# Altium PCB GEM_HV_channel.PcbDoc (part 2 of 3)
Units mm, origin at the board's own origin, x right, y up, seen from the top; angles counter-clockwise.
Board outline 124.5 x 38 mm, 4 copper layers (Top Layer, Layer 1, Layer 2, Bottom Layer), stack 1.441 mm thick; 166 components, 114 nets, 518 pads, 164 vias.
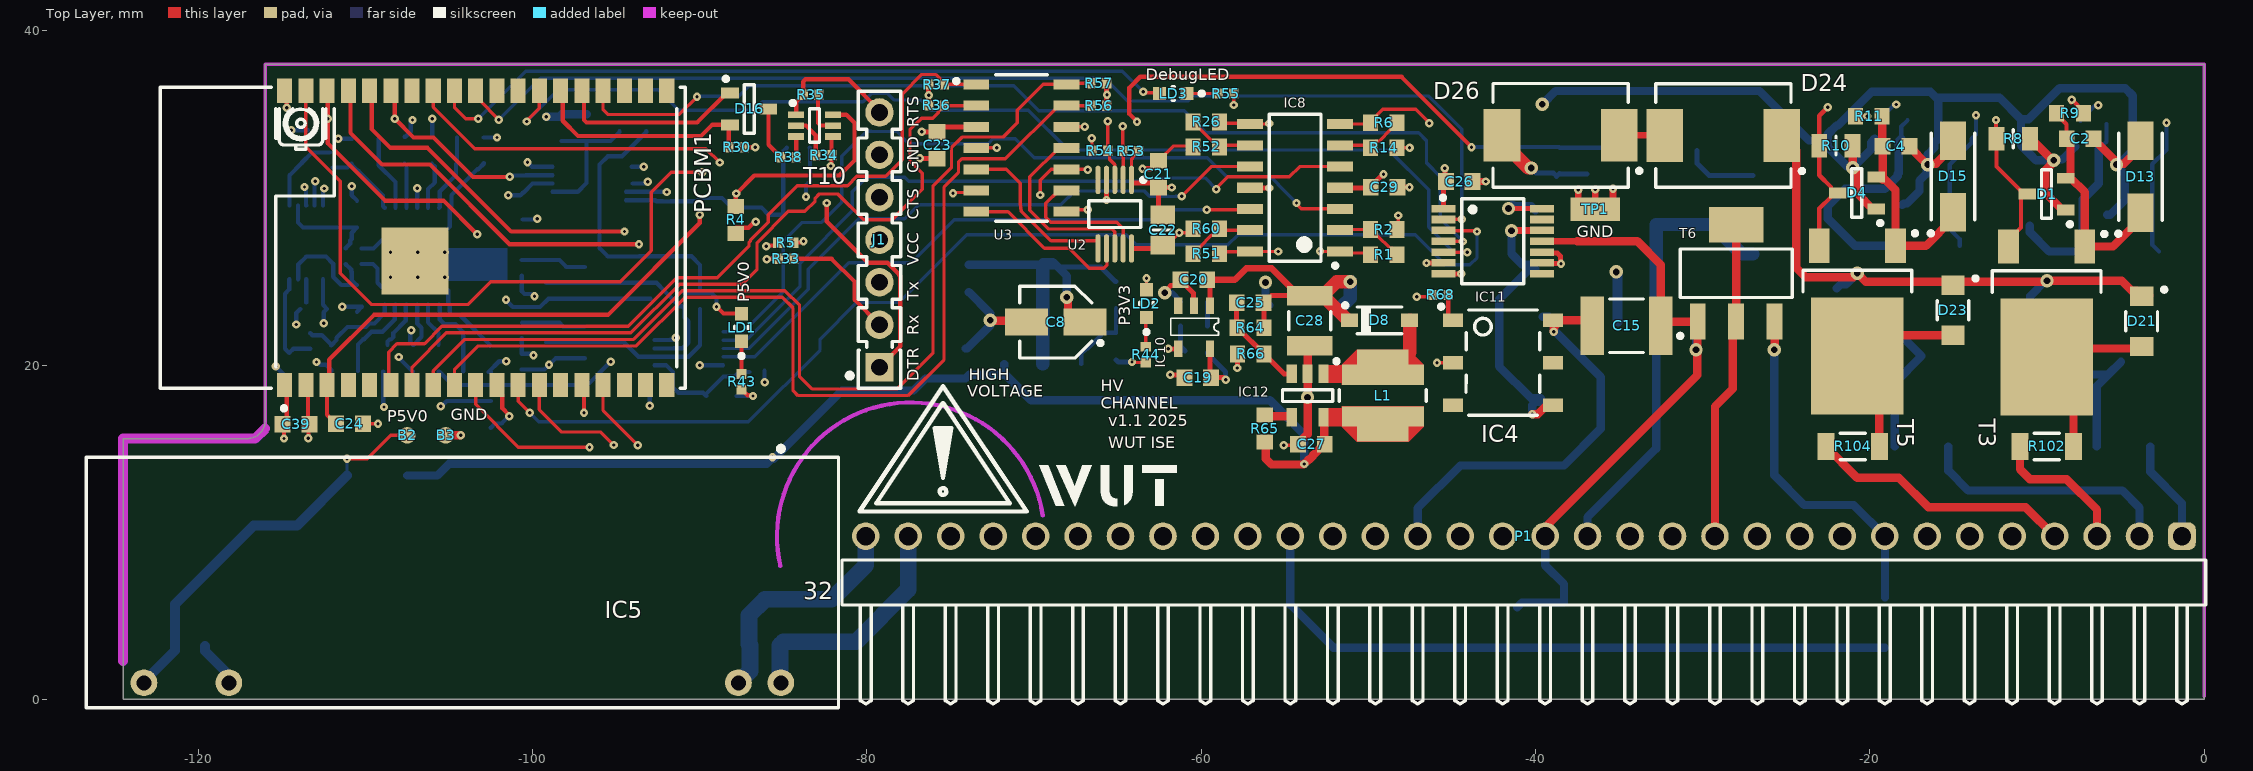
[diagram p0: Top Layer view]

## Part data (continued)
R43: library part R0402_3K3_1%_0.0625W_100PPM, "Resistor - 1%", Case=0402, Manufacturer=GENERIC, Manufacturer1 ComponentHeight=0.4mm, Manufacturer1 Example="YAGEO PHYCOMP", Manufacturer1 Part Number=232270673302L, Power=0.0625W, Tolerance=±1%, Author="CERN DEM JLC", Component Type=Standard, CreateDate=03.12.2007, HelpURL=\\cern.ch\dfs\Applications\Altium\Datasheets\R0402_Phycomp_RC0402.pdf, LatestRevisionDate=17.10.2012, Manufacturer Part Number=R0402_3K3_1%_0.0625W_100PPM, Mounted=Yes, Part Description="General Purpose Thick Film Chip Resistor", Part Number=R0402_3K3_1%_0.0625W_100PPM, Pin Count=2, PressFit=No, Sense=No, SMD=Yes, Socket=No, Status="Not Recommended", TC=±100ppm/°C
R61 R64: library part R0603_510K_1%_0.1W_100PPM, "Resistor - 1%", Case=0603, Manufacturer=GENERIC, Manufacturer1 ComponentHeight=0.55mm, Manufacturer1 Example="NIC COMPONENT", Manufacturer1 Part Number=NRC06F5103TRF, Power=0.1W, Tolerance=±1%, Author="CERN DEM JLC", Component Type=Standard, CreateDate=03.12.2007, HelpURL=\\cern.ch\dfs\Applications\Altium\Datasheets\R0603_NIC_NRC.pdf, LatestRevisionDate=13.03.2008, Manufacturer Part Number=R0603_510K_1%_0.1W_100PPM, Mounted=Yes, Part Description="General Purpose Thick Film Chip Resistor", Part Number=R0603_510K_1%_0.1W_100PPM, Pin Count=2, PressFit=No, Sense=No, SMD=Yes, Socket=No, Status=Preferred, TC=±100ppm/°C
R62 R63 R65 R66: library part R0603_18K_1%_0.1W_100PPM, "Resistor - 1%", Case=0603, Manufacturer=GENERIC, Manufacturer1 ComponentHeight=0.55mm, Manufacturer1 Example="NIC COMPONENT", Manufacturer1 Part Number=NRC06F1802TRF, Power=0.1W, Tolerance=±1%, Author="CERN DEM JLC", Component Type=Standard, CreateDate=03.12.2007, HelpURL=\\cern.ch\dfs\Applications\Altium\Datasheets\R0603_NIC_NRC.pdf, LatestRevisionDate=13.03.2008, Manufacturer Part Number=R0603_18K_1%_0.1W_100PPM, Mounted=Yes, Part Description="General Purpose Thick Film Chip Resistor", Part Number=R0603_18K_1%_0.1W_100PPM, Pin Count=2, PressFit=No, Sense=No, SMD=Yes, Socket=No, Status=Preferred, TC=±100ppm/°C
R68: library part R0402_330R_1%_0.0625W_100PPM, "Resistor - 1%", Case=0402, Manufacturer=GENERIC, Manufacturer1 ComponentHeight=0.4mm, Manufacturer1 Example="YAGEO PHYCOMP", Manufacturer1 Part Number=232270673301L, Power=0.0625W, Tolerance=±1%, Author="CERN DEM JLC", Component Type=Standard, CreateDate=03.12.2007, HelpURL=\\cern.ch\dfs\Applications\Altium\Datasheets\R0402_Phycomp_RC0402.pdf, LatestRevisionDate=17.10.2012, Manufacturer Part Number=R0402_330R_1%_0.0625W_100PPM, Mounted=Yes, Part Description="General Purpose Thick Film Chip Resistor", Part Number=R0402_330R_1%_0.0625W_100PPM, Pin Count=2, PressFit=No, Sense=No, SMD=Yes, Socket=No, Status="Not Recommended", TC=±100ppm/°C
R73: library part R0402_10R_1%_0.0625W_200PPM, "Resistor - 1%", Case=0402, Manufacturer=GENERIC, Manufacturer1 ComponentHeight=0.4mm, Manufacturer1 Example="YAGEO PHYCOMP", Manufacturer1 Part Number=232270671009L, Power=0.0625W, Tolerance=±1%, Author="CERN DEM JLC", Component Type=Standard, CreateDate=24.06.2009, HelpURL=\\cern.ch\dfs\Applications\Altium\Datasheets\R0402_Phycomp_RC0402.pdf, LatestRevisionDate=17.10.2012, Manufacturer Part Number=R0402_10R_1%_0.0625W_200PPM, Mounted=Yes, Part Description="General Purpose Thick Film Chip Resistor", Part Number=R0402_10R_1%_0.0625W_200PPM, Pin Count=2, PressFit=No, Sense=No, SMD=Yes, Socket=No, Status="Not Recommended", TC=±200ppm/°C
R101 R102 R103 R104: library part R1206_50K_1%_0.33W_100PPM_SEI_HVC, "Resistor - 1%", Case=1206, Manufacturer="SEI (STACKPOLE ELECTRONICS INC.)", Manufacturer Part Number=HVCB1206FDD50K0, Power=0.33W, Tolerance=±1%, Voltage=1500V, Author="CERN DEM JLC", Component Type=Standard, ComponentHeight=0.76mm, CreateDate=18.01.2018, HelpURL=\\cern.ch\dfs\Applications\Altium\Datasheets\R1206_SEI_HVC.pdf, LatestRevisionDate=28.06.2022, Mounted=Yes, Part Description="High Voltage Thick Film Chip Resistor", Part Number=R1206_50K_1%_0.33W_100PPM_SEI_HVC, Pin Count=2, PressFit=No, Sense=No, SMD=Yes, Socket=No, Status=None, TC=±100ppm/°C
R107 R108 R109 R110: library part R0603_6K8_1%_0.1W_100PPM, "Resistor - 1%", Case=0603, Manufacturer=GENERIC, Manufacturer1 ComponentHeight=0.55mm, Manufacturer1 Example="NIC COMPONENT", Manufacturer1 Part Number=NRC06F6801TRF, Power=0.1W, Tolerance=±1%, Author="CERN DEM JLC", Component Type=Standard, CreateDate=03.12.2007, HelpURL=\\cern.ch\dfs\Applications\Altium\Datasheets\R0603_NIC_NRC.pdf, LatestRevisionDate=13.03.2008, Manufacturer Part Number=R0603_6K8_1%_0.1W_100PPM, Mounted=Yes, Part Description="General Purpose Thick Film Chip Resistor", Part Number=R0603_6K8_1%_0.1W_100PPM, Pin Count=2, PressFit=No, Sense=No, SMD=Yes, Socket=No, Status=Preferred, TC=±100ppm/°C
T1: library part Q_PBHV8560Z, "600 V, 0.5 A NPN high-voltage low VCEsat (BISS) transistor", Case=SOT223, Manufacturer=Nexperia, Author=GK, Bonding=No, Component Type=Standard, ComponentHeight=1.8mm, CreateDate=15.06.2011, Device=PBHV8560ZX, HelpURL=\\cern.ch\dfs\Applications\Altium\Datasheets\FZT458TA.pdf, LatestRevisionDate=15.06.2011, Manufacturer Part Number=PBHV8560ZX, Mounted=Yes, PackageDescription="SOT223, 2.30mm Pitch; 4 Pin, 3.70mm W X 6.70mm L X 1.80mm H body, IPC Medium Density", Part Description="600V 500mA NPN High Voltage Transistor", Part Number=PBHV8560ZX, Pin Count=4, PressFit=No, Sense=No, SMD=Yes, Socket=No
T2 T3 T4 T5: "N-CHANNEL MOSFET WITH DIODE", Case=DPAK, Manufacturer=IXYS, Author="CERN DEM JLC", Bonding=No, Component Type=Standard, ComponentHeight=2.38mm, CreateDate=04.02.2009, Device=IXTY01N100, HelpURL=\\cern.ch\dfs\Applications\Altium\Datasheets\IXTY01N100.pdf, LatestRevisionDate=31.01.2011, Manufacturer Part Number=IXTY01N100, Mounted=Yes, PackageDescription="TO-252AA DPAK TO, 2.28mm pitch; 2 pin,9.91mm L X 6.095mm W X 2.38mm H body, IPC Medium Density", Part Description="1000V 100mA N-Channel High Voltage MOSFET", Part Number=IXTY01N100, Pin Count=3, PressFit=No, Sense=No, SMD=Yes, Socket=No
T6: "PNP Transistor", Case=SOT223, Manufacturer=STMicroelectronics, Author=FS, Bonding=No, Component Type=Standard, ComponentHeight=1.8mm, CreateDate=15.06.2011, Device=STN9360, HelpURL=\\cern.ch\dfs\Applications\Altium\Datasheets\BF723,115.pdf, LatestRevisionDate=15.06.2011, Manufacturer Part Number=STN9360, Mounted=Yes, PackageDescription="SOT223, 2.30mm Pitch; 4 Pin, 3.70mm W X 6.70mm L X 1.80mm H body, IPC Medium Density", Part Description="250V 100mA PNP High-Voltage Transistors", Part Number=STN9360, Pin Count=4, PressFit=No, Sense=No, SMD=Yes, Socket=No
T8 T9: "N-CHANNEL MOSFET WITH DIODE", Case=SOT23-3, Manufacturer="ON SEMICONDUCTOR", Manufacturer Part Number=BSS138L, Author="CERN DEM JLC", Bonding=No, Component Type=Standard, ComponentHeight=1.11mm, CreateDate=23.03.2009, Device=BSS138LT1G, HelpURL=\\cern.ch\dfs\Applications\Altium\Datasheets\BSS138LT1G.pdf, LatestRevisionDate=25.05.2022, Mounted=Yes, PackageDescription="SOT23, 0.95mm Pitch; 3 Pin, 1.40mm W X 3.00mm L X 1.10mm H body, IPC Medium Density", Part Description="50V, 200mA N-Channel Enhancement Mode Field-Effect Transistor", Part Number=BSS138LT1G, Pin Count=3, PressFit=No, Sense=No, SMD=Yes, Socket=No
T10: "45V 100mA Dual NPN General-Purpose Transistor", Case=SOT363, Manufacturer="NXP SEMICONDUCTORS", Author="CERN DEM JMW", Bonding=No, Component Type=Standard, ComponentHeight=1.1mm, CreateDate=10.07.2015, Device=BC847BS, HelpURL=\\cern.ch\dfs\Applications\Altium\Datasheets\BC847BS.pdf, LatestRevisionDate=10.07.2015, Manufacturer Part Number=BC847BS, Mounted=Yes, PackageDescription="SOT363, SC-88, SOT, 0.65mm Pitch, 6 pin, 1.25mm W X 2.00mm L X 1.10mm H, IPC Medium Density", Part Description="45V 100mA Dual NPN General-Purpose Transistor", Part Number=BC847BS, Pin Count=6, PressFit=No, Sense=No, SMD=Yes, Socket=No
TP1: library part TYCO_RCT-0C, "Test Point", Manufacturer="TYCO ELECTRONICS", Manufacturer Part Number=RCT-0C, Author="CERN DEM JLC", Component Type=Standard, ComponentHeight=1.45mm, CreateDate=07.05.2014, HelpURL=\\cern.ch\dfs\Applications\Altium\Datasheets\TYCO_RCT-0C.pdf, LatestRevisionDate=07.05.2014, Mounted=Yes, Part Description="0805 (2012) Surface Mount Test Point", Part Number=TYCO_RCT-0C, Pin Count=1, PressFit=No, Sense=No, SMD=Yes, Socket=No, Status=None
U1 U2: library part CMP-0188-01008-2, "12-Bit Quad Digital-to-Analog Converter with EEPROM Memory, 10-pin MSOP, Extended Temperature", ComponentLink1Description="Manufacturer URL", ComponentLink1URL=http://www.microchip.com/, ComponentLink2Description=Datasheet, ComponentLink2URL=http://ww1.microchip.com/downloads/en/DeviceDoc/22187E.pdf, ComponentLink3Description="Package Specification", ComponentLink3URL=http://www.microchip.com/stellent/groups/techpub_sg/documents/packagingspec/en012702.pdf, DatasheetVersion="revE, Oct-2010", PackageDescription="10-Lead Plastic Micro Small Outline Package (UN) [MSOP]", PackageReference=MSOP-UN10, PackageVersion="revBB, Aug-2009", RevisionNote="URLs added. DatasheetVersion updated."
U3: library part CMP-04896-000053-1, "IC QUAD LV COMPARATOR 14-SOIC", Case/Package=SOIC, Input Bias Current=250nA, Input Offset Voltage (Vos)=7mV, Max Operating Temperature=125°C, Max Supply Current=75uA, Max Supply Voltage=5.5V, Min Operating Temperature=-40°C, Min Supply Voltage=2.7V, Nominal Supply Current=300uA, Operating Supply Voltage=5V, Output Current=84mA, Output Current per Channel=10mA, Package Quantity=1, Quiescent Current=350uA, Voltage Gain=93.98dB, Contact Plating=Gold, Height=1.58mm, Lead Free="Lead Free", Length=8.65mm, Max Input Current=250nA, Mount="Surface Mount", Number of Channels=4, Number of Elements=4, Number of Pins=14, Output Compatibility=CMOS, Packaging="Tape and Reel", Propagation Delay=600ns, Radiation Hardening=No, REACH SVHC="No SVHC", Response Time=600ns, RoHS Compliant=Yes, Series=LMV339, Supply Current=300uA, Technology=BIPOLAR, Type="General Purpose", Weight=0.004564oz, Width=3.91mm

## Via types
v1: diameter 0.5, hole 0.2, Top Layer to Bottom Layer, tented both sides, 139 vias
v2: diameter 0.8, hole 0.4, Top Layer to Bottom Layer, tented both sides, 19 vias
v3: diameter 0.5, hole 0.2, Top Layer to Bottom Layer, 6 vias

## Nets (pads, with @x,y where several pads share a name; then routed paths per layer and width w, separated by ;. In a path a pad name is that pad's centre, name@x,y a point inside that pad or via, vN(x,y) a via of type N, cw(c..) or ccw(c..) an arc to the next point about the centre after c; other vN are vias at no path point)
CH_ID0: P1.26 PCBM1.10 | length 48.8
  Top Layer w0.2: PCBM1.10@-103.404,18.818 -103.404,17.654 -100.85,15.1 v1(-96.6,15.1)
  Layer 2 w0.2: v1(-96.6,15.1) -95.685,14.185 -87.763,14.185 -83.588,18.361 -80.944,18.361 -80.543,17.96 -79.521,17.96 -79.348,18.133 -78.481,18.133 -78.271,18.343 -77.171,18.343 -76.969,18.545 -70.485,18.545 -64.83,12.89 P1.26@-64.83,9.77
CH_ID1: P1.25 PCBM1.13 | length 47.7
  Top Layer w0.2: PCBM1.13@-99.594,18.818 -99.594,17.344 -98.25,16 -95.931,16 v1(-95.154,15.224)
  Layer 2 w0.2: v1(-95.154,15.224) -94.506,14.575 -87.925,14.575 -83.749,18.751 -80.78,18.751 -80.78,18.748 -80.382,18.35 -79.682,18.35 -79.509,18.523 -78.643,18.523 -78.432,18.733 -77.332,18.733 -77.131,18.935 -68.335,18.935 -62.29,12.89 P1.25@-62.29,9.77
CH_ID2: P1.24 PCBM1.16 | length 47
  Top Layer w0.2: PCBM1.16@-95.784,18.818 -95.784,17.284 v1(-93.705,15.205)
  Layer 2 w0.2: v1(-93.705,15.205) -88.185,15.205 -84.01,19.38 -81.86,19.38 -80.22,21.02 -78.28,21.02 -76.64,19.38 -66.88,19.38 -59.75,12.25 P1.24@-59.75,9.77
CSn: IC11.3 PCBM1.12 | length 68.9
  Top Layer w0.2: PCBM1.12@-100.864,18.818 -100.864,17.846 v1(-100.168,17.15) ; IC11.3@-45.515,28.065 -45.498,28.048 -43.548,28.048 v1(-43.5,28)
  Bottom Layer w0.2: v1(-100.168,17.15) -99.624,16.606 -87.102,16.606 -82.803,20.906 -82.803,21.561 -80.614,23.75 -78.079,23.75 -74.029,27.8 -64.5,27.8 -63.9,27.2 -58.4,27.2 -57.8,27.8 -47.2,27.8 -45.4,26 -44.677,26 -44.669,26.007 -44.222,26.007 -44.215,26 -43.939,26 -43.5,26.439 v1(-43.5,28)
DAC_1_OUT0: IC8.3 R49.1 U1.6 | length 47.5
  Top Layer w0.2: v1@-54.33,29.67 -54.025,29.365 -51.709,29.365 IC8.3@-51.688,29.343
  Bottom Layer w0.2: U1.6@-88.615,22 -87.404,22 -85,24.404 R49.1@-85,27.4 -83.863,28.537 -82.713,28.537 -81.5,29.75 -81.5,32.5 -80,34 -79.742,34 -79.722,33.98 -78.23,33.98 -77.5,33.25 -72.753,33.25 -72.463,33.54 -71.127,33.54 -70,32.413 -59.629,32.413 -58.506,31.29 -55.89,31.29 -55.739,31.139 -55.713,31.139 -55.397,30.823 -55.397,30.797 v1(-54.3,29.7)
DAC_1_OUT1: IC8.5 U1.7 | length 43.5
  Top Layer w0.2: v1(-59.099,30.524) -59.099,30.578 -58.404,31.272 -54.728,31.272 -54.117,31.883 IC8.5@-51.688,31.883
  Bottom Layer w0.2: U1.7@-88.615,21.5 -87.214,21.5 -84,24.714 -84,26.109 -80.88,29.229 -80.88,30.37 -80,31.25 -77.726,31.25 -77.488,31.012 -63.008,31.012 -62.82,31.2 -59.775,31.2 v1(-59.099,30.524)
DAC_1_OUT2: IC8.10 U1.8 | length 37
  Top Layer w0.2: v1(-61.176,30.1) -59.393,31.883 IC8.10@-57.088,31.883
  Bottom Layer w0.2: U1.8@-88.615,21 -87.039,21 -83.5,24.539 -83.5,25.75 -80.5,28.75 -77.75,28.75 -76.9,29.6 -68.4,29.6 -67.58,30.42 -63.42,30.42 -63.096,30.096 -62,30.096 -61.99,30.086 -61.543,30.086 -61.533,30.096 v1@-61.181,30.096
DAC_1_OUT3: IC8.12 U1.9 | length 35.2
  Top Layer w0.2: v1(-59.672,29.294) -57.137,29.294 IC8.12@-57.088,29.343
  Bottom Layer w0.2: U1.9@-88.615,20.5 -86.711,20.5 -81.075,26.136 -77.349,26.136 -74.785,28.7 -62.501,28.7 -61.907,29.294 v1(-59.672,29.294)
DAC_2_OUT0: U2.6 U3.5 | length 10.4
  Top Layer w0.2: U3.5@-73.46,31.719 -71.669,31.719 -70.832,30.882 -70.832,29.886 ccw(c-67.364,29.886) -70.764,29.207 -68.991,27.434 -66.172,27.434 U2.6@-66.172,26.983
DAC_2_OUT1: U2.7 U3.7 | length 10.3
  Top Layer w0.2: U3.7@-73.46,29.179 -71.557,29.179 -69.378,27 -67.9,27 -66.7,25.8 -65.836,25.8 -65.636,26 -65.636,26.946 U2.7@-65.672,26.983
DAC_2_OUT2: U2.8 U3.11 | length 11.5
  Top Layer w0.2: U3.11@-68.06,32.989 -68.535,32.989 -70.262,31.262 -70.262,29.257 -69.156,28.151 -65.348,28.151 -65.172,27.975 U2.8@-65.172,26.983
DAC_2_OUT3: U2.9 U3.9 | length 8.4
  Top Layer w0.2: U3.9@-68.06,30.449 -68.535,30.449 -69.296,29.688 -69.296,28.842 -68.995,28.541 -65.041,28.541 -64.672,28.172 U2.9@-64.672,27.083
DAC_OUT0: IC8.1 R1.2 R15.2 | length 54.9
  Top Layer w0.2: v1(-52.899,26.809) -52.893,26.803 IC8.1@-51.688,26.803 -51.591,26.707 -49.979,26.707 R1.2@-49.886,26.613 R1.2@-49.886,26.563
  Layer 2 w0.2: v1(-52.899,26.809) -52.191,26.809 -45.391,33.609 -8.289,33.609 v1(-6.339,35.558)
  Bottom Layer w0.254: R15.2@-7.394,34.629 -7.394,34.679 -6.561,35.511 -6.386,35.511 v1(-6.339,35.558) v1@-6.255,35.558
DAC_OUT1: IC8.7 R6.2 R9.2 | length 46.7
  Top Layer w0.2: IC8.7@-51.688,34.423 -49.972,34.423 R6.2@-49.886,34.51 -49.886,34.56 -49.146,35.3 -47.158,35.3 v1@-46.382,34.523
  Top Layer w0.254: v1@-7.962,35.736 -7.962,35.838 v1(-7.915,35.886) -7.552,35.523 -7.552,35.393 R9.2@-7.229,35.07
  Layer 2 w0.2: v1(-46.368,34.482) -41.459,34.482 -41.017,34.04 -40.714,34.04 -40.708,34.034 -39.901,34.034 -21.863,34.034 -21.857,34.04 -9.76,34.04 v1(-7.915,35.886)
DAC_OUT2: IC8.8 R26.2 R29.2 | length 44.5
  Top Layer w0.2: R26.2@-58.905,34.473 -57.137,34.473 IC8.8@-57.088,34.423 -55.967,34.423 v1(-55.933,34.457)
  Layer 2 w0.2: v1(-55.933,34.457) -51.343,34.457 -50.283,35.517 -40.493,35.517 -39.886,34.91 -39.733,34.91 -39.709,34.886 -38.715,34.886 ; v1(-18.421,35.591) -21.409,35.591 -22.114,34.886 -38.715,34.886 ; -38.715,34.886 -39.638,34.886 -38.715,34.886
  Bottom Layer w0.254: R29.2@-19.163,34.927 -19.163,34.977 -18.596,35.544 -18.468,35.544 v1(-18.421,35.591) v1@-18.374,35.544
DAC_OUT3: IC8.14 R11.2 R51.2 | length 43.1
  Top Layer w0.2: R51.2@-58.895,26.666 -58.778,26.784 -57.107,26.784 IC8.14@-57.088,26.803 ; IC8.14@-56.7,26.8 v1(-55.4,26.8)
  Top Layer w0.254: R11.2@-20.867,34.898 v1(-20.157,34.898) v1@-20.142,34.898
  Layer 2 w0.2: v1(-55.4,26.8) -47.073,35.127 -41.249,35.127 -40.546,34.424 -22.025,34.424 -21.551,34.898 v1(-20.157,34.898)
DEBUG: LD3.2 PCBM1.30 | length 45.2
  Top Layer w0.2: PCBM1.30@-104.674,36.418 -104.674,35.424 -104,34.75 v1(-103.25,34.75) ; v1(-63.476,36.348) -63.423,36.295 -62.545,36.295 LD3.2@-62.5,36.25
  Bottom Layer w0.2: v1(-103.25,34.75) -100.409,37.591 -64.719,37.591 v1(-63.476,36.348)
DIV_IN: C15.1 D5.1 D11.1 IC11.11 P1.16 T1.1 T6.1 | length 39.4
  Top Layer w0.4: IC11.11@-39.615,27.415 -37.5,27.415
  Top Layer w0.5: P1.16@-39.43,9.77 -39.43,10.297 -31.114,18.612 -30.318,19.409 -30.318,20.837 v2(-30.402,20.921) -30.364,20.921 -30.315,20.97 T6.1@-30.315,22.585 ; -37.5,27.415 -33.915,27.415 -32.502,26.002 C15.1@-32.502,22.358 -32.261,22.6 T6.1@-30.3,22.6
  Bottom Layer w0.5: D11.1@-41.1,5.515 -40.815,5.8 D5.1@-38.3,5.8 -38.3,6.9 -39.43,8.03 P1.16@-39.43,9.77 ; T1.1@-30.473,22.614 -30.402,22.543 v2(-30.402,20.921)
DIV_OUT: C15.2 IC4.6 P1.19 R3.2 | length 27.3
  Top Layer w0.5: v1(-38.915,21.998) -38.915,22.248 IC4.6@-38.47,22.693 ; IC4.6@-38.447,22.693 -36.834,22.693 C15.2@-36.515,23.012 ; C15.2@-36.965,21.339 -36.965,22.562 C15.2@-36.885,22.642
  Bottom Layer w0.5: P1.19@-47.05,9.77 -47.05,11.45 -44.5,14 -38.3,14 -36.1,16.2 -36.1,19.282 -38.817,21.998 v1(-38.915,21.998) ; R3.2@-39.581,22.893 -39.2,22.893 -38.913,22.606 v1@-38.913,22.001
ESP_EN: C24.2 PCBM1.3 R4.2 T10.6 | length 45.2
  Top Layer w0.254: PCBM1.3@-112.294,18.818 -112.294,17.037 C24.2@-111.757,16.5 ; PCBM1.3@-112.169,18.818 -112.169,20.331 -109.488,23.012 -95.488,23.012 -90,28.5 v1(-90,29) ; R4.2@-87.84,29.489 R4.2@-87.674,29.655 ; R4.2@-87.84,29.75 -87.84,30.245 -86.744,31.341 -81.659,31.341 -80.75,32.25 -80.75,34.5 -81.231,34.981 T10.6@-82.034,34.981
  Layer 2 w0.2: v1(-90,29) -88.733,30.267 v1(-87.818,30.267)
GEM_O0: P1.1 R101.2 | length 6.2
  Bottom Layer w0.5: R101.2@-3.225,15.138 -3.225,13.625 -1.33,11.73 P1.1@-1.33,9.77
GEM_O1: P1.3 R102.2 | length 8.6
  Top Layer w0.5: R102.2@-11.024,15.138 -11.024,13.774 -10.427,13.177 -8.226,13.177 -6.41,11.361 P1.3@-6.41,9.77
GEM_O2: P1.2 R103.2 | length 15.5
  Bottom Layer w0.5: R103.2@-15.309,15.138 -15.309,13.691 -14.118,12.5 -4.9,12.5 -3.87,11.47 P1.2@-3.87,9.77
GEM_O3: P1.4 R104.2 | length 15.9
  Top Layer w0.5: R104.2@-22.63,15.138 -20.756,13.263 -18.263,13.263 -16.5,11.5 -10.68,11.5 P1.4@-8.95,9.77
GND: C6.1 IC5.2 P1.32 | length 14.2
  Bottom Layer w1: IC5.2@-87.69,1 -86.996,1.694 C6.1@-86.996,3.246 ; C6.1@-87.061,3.311 -87.061,5.039 -86.11,5.99 -82.108,5.99 -80.07,8.028 P1.32@-80.07,9.77